# Altium PCB PCB_daQ.PcbDoc
Units mil, origin at the board's own origin, x right, y up, seen from the top; angles counter-clockwise.
Board outline 3750 x 3200 mil, 2 copper layers (Top Layer, Bottom Layer); 25 components, 41 nets, 141 pads, 35 vias.
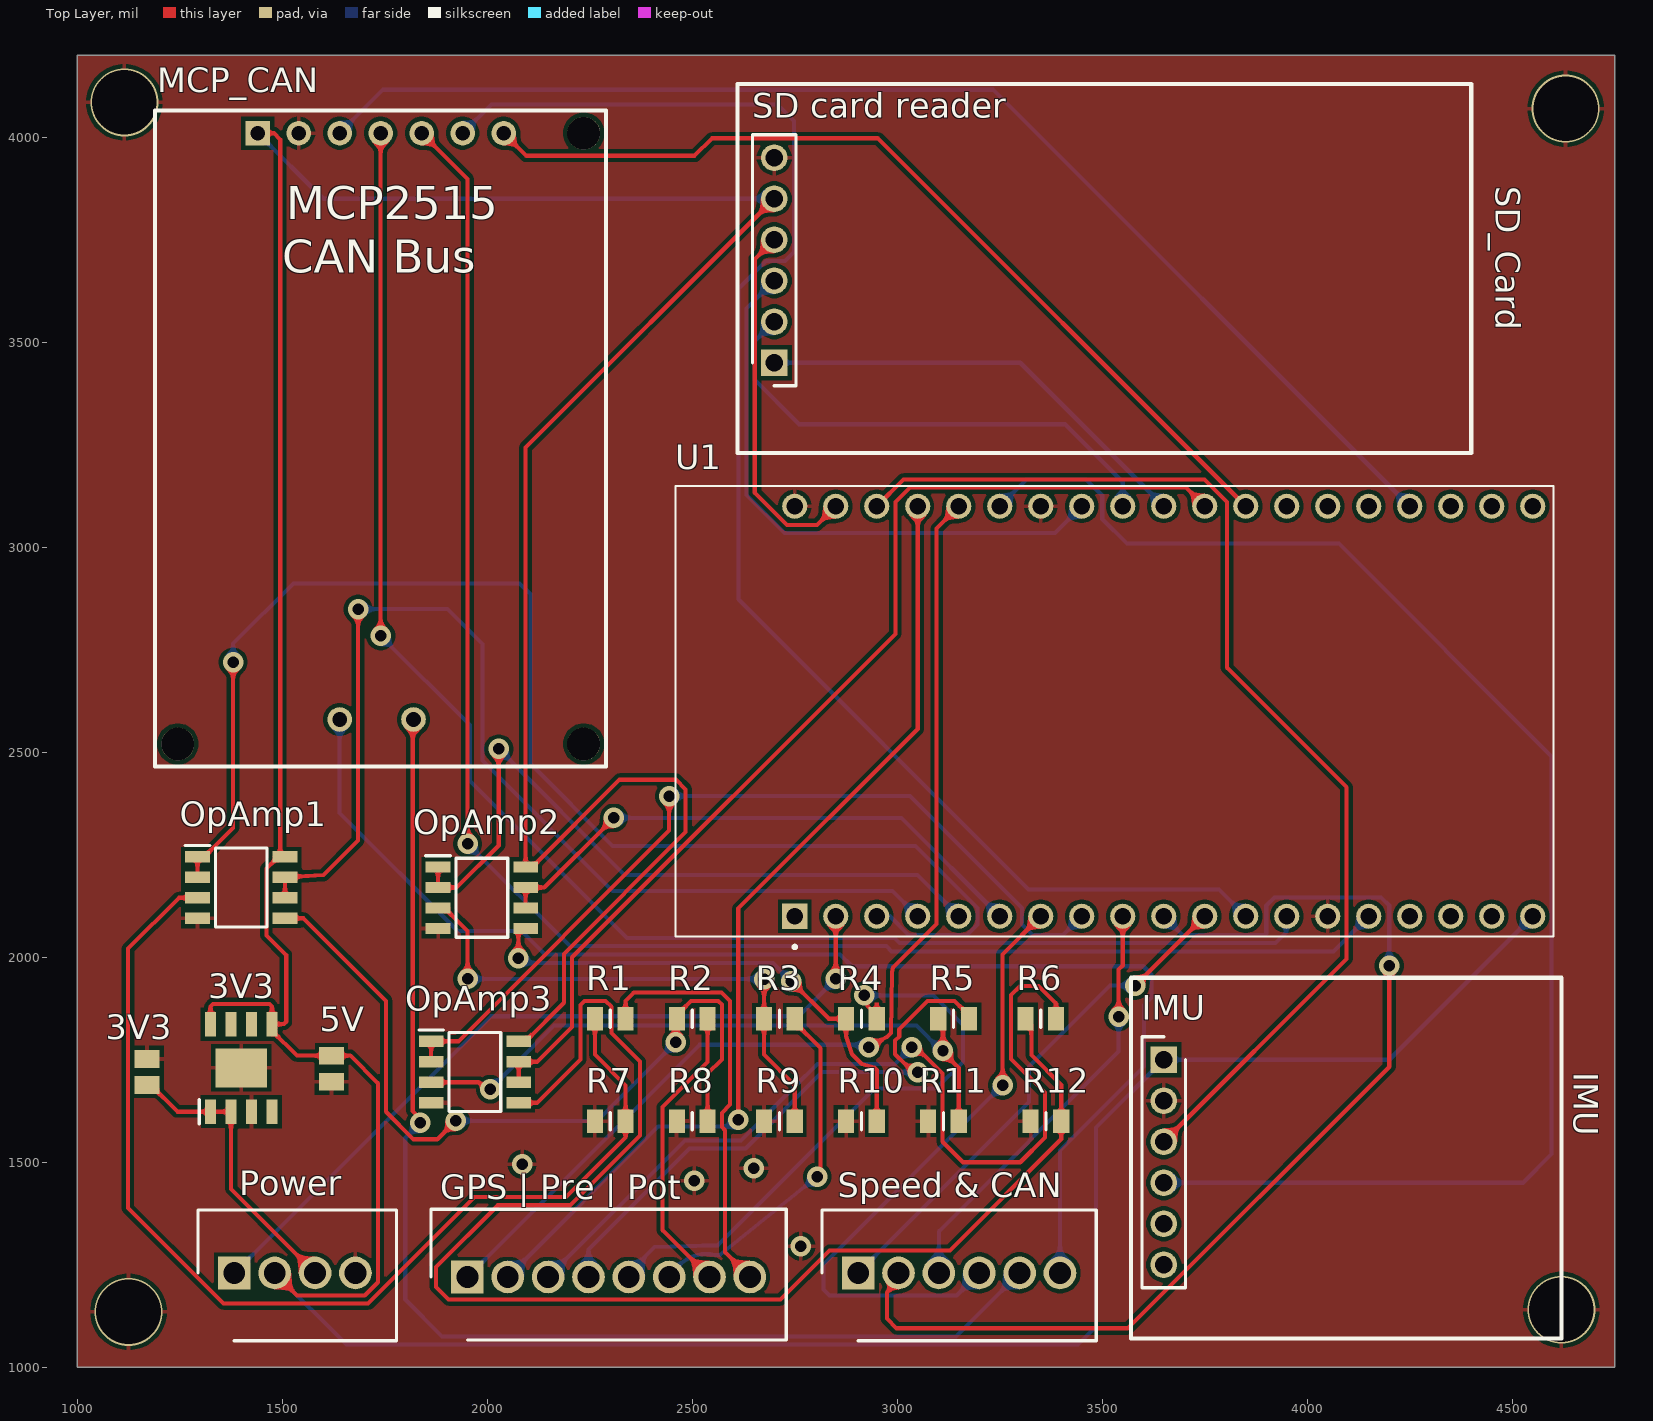
[diagram p0: Top Layer view]
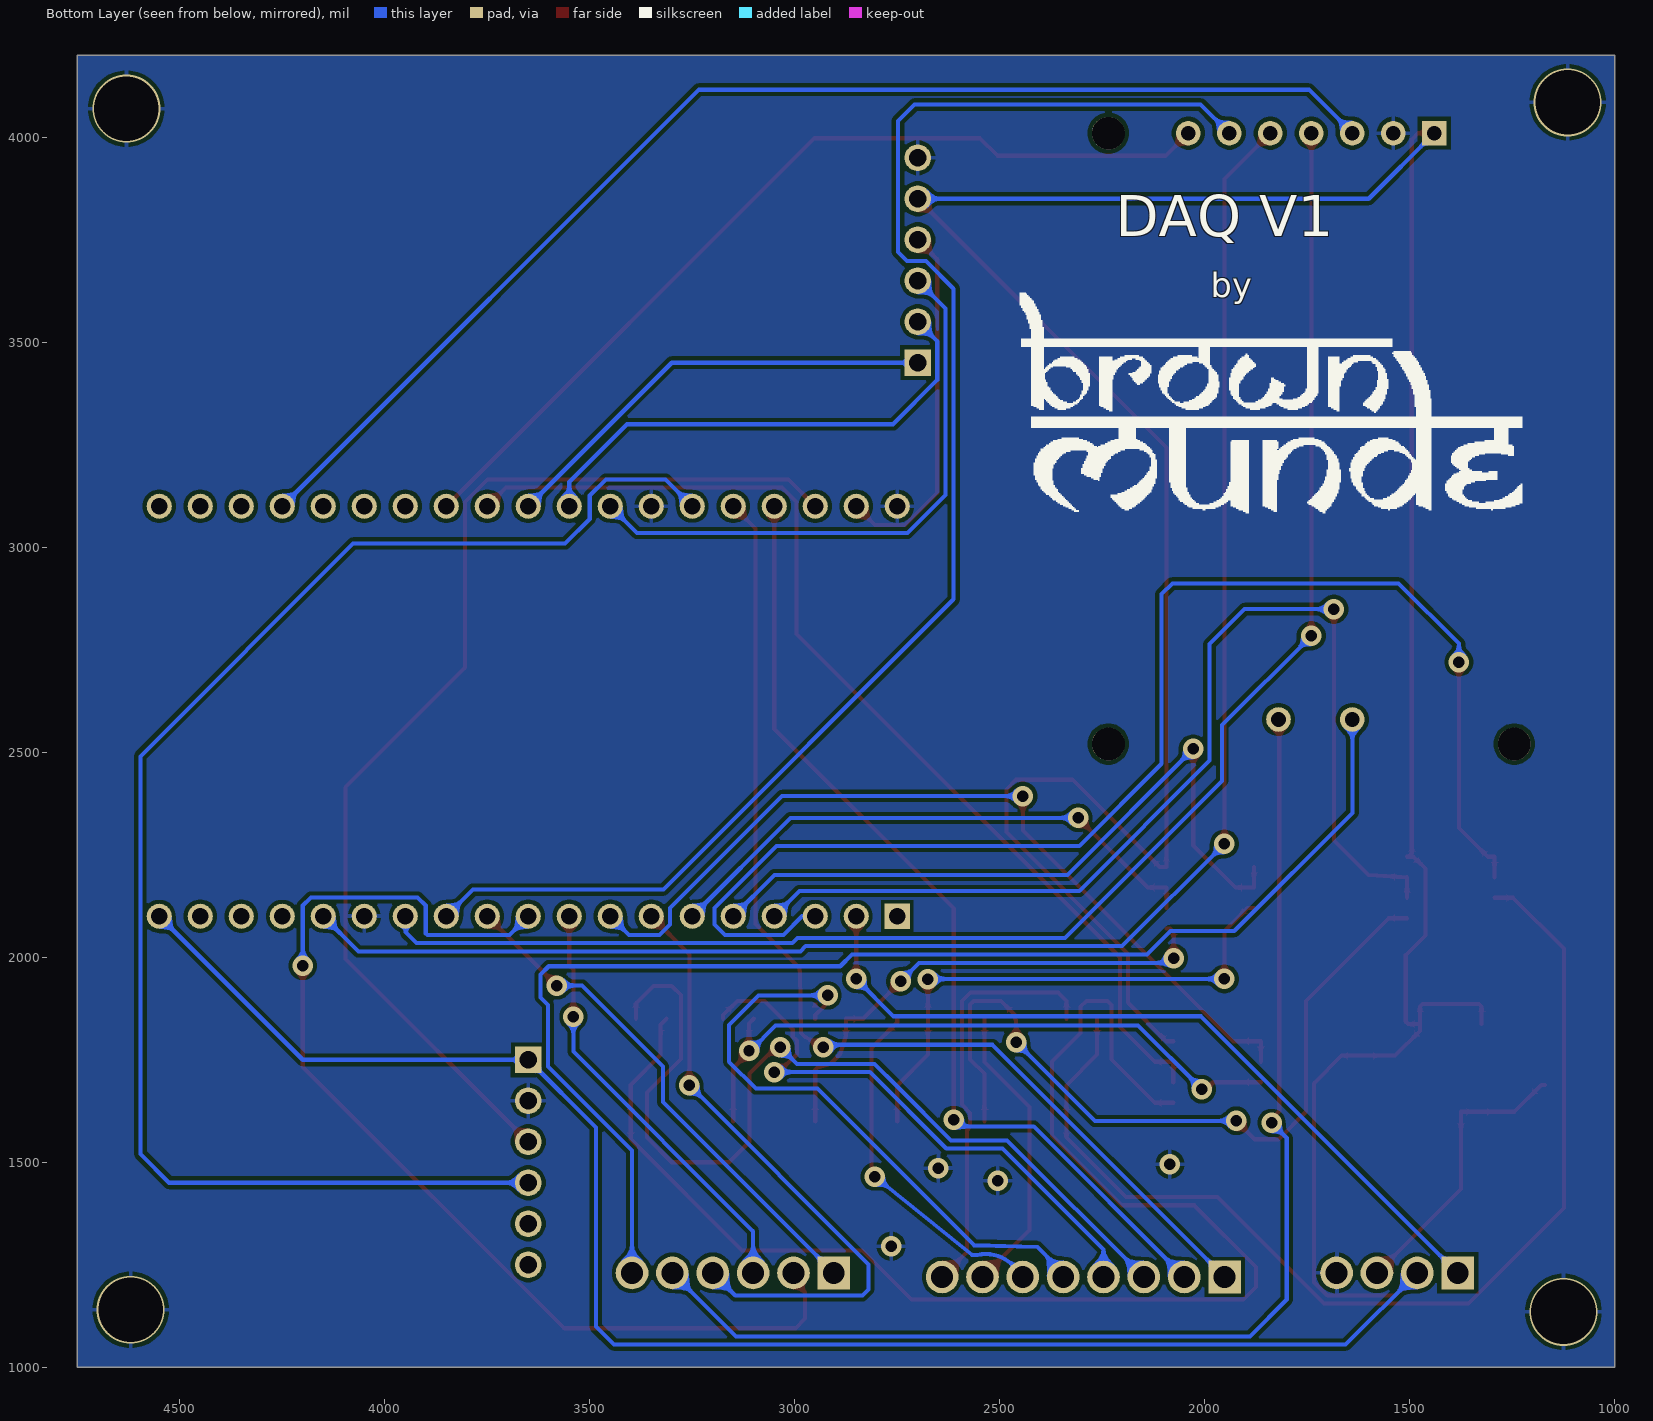
[diagram p1: Bottom Layer view, seen from below]
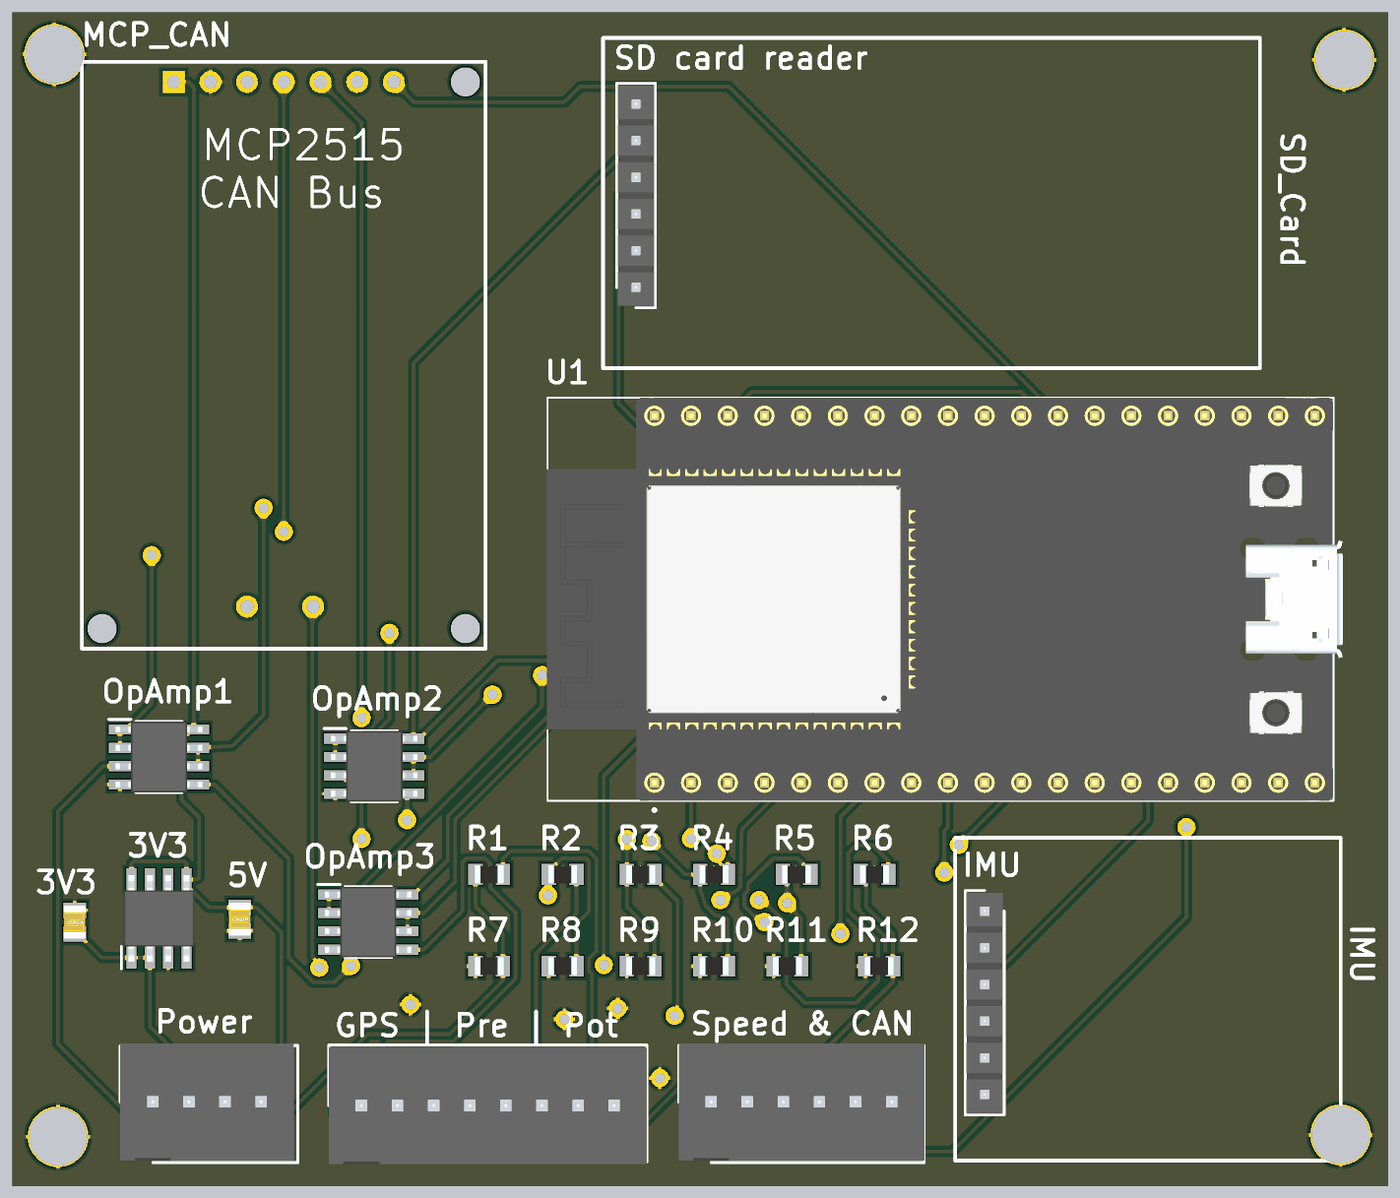
[diagram p2: 3D render of the assembled board from above, using the file's embedded part models]

## Layer stack, top to bottom
Top Solder: solder mask 0.4, Solder Resist, Dk 3.5
Top Layer: signal copper 1.4
Dielectric 1: dielectric 12.6, FR-4, Dk 4.8
Bottom Layer: signal copper 1.4
Bottom Solder: solder mask 0.4, Solder Resist, Dk 3.5

## Board outline
1000,1000 4750,1000 4750,4200 1000,4200

## Design rules (kind name [scope] priority, off if disabled: settings)
Clearance [All] p1: gap=10 ignorepadtopadclearanceinfootprint=FALSE except(0: Arc-Hole Track-Hole SMDPad-Hole THPad-Hole Via-Hole Fill-Hole Poly-Hole Region-Hole Text-Hole)
PolygonConnect [All] p1: connectstyle=Relief reliefconductorwidth=10 reliefentries=4 polygonreliefangle="90 Angle" airgapwidth=10
RoutingVias [All] p1: holewidth=28 width=50 viastyle="Through Hole" minholewidth=28 minwidth=50 maxholewidth=28 maxwidth=50
SolderMaskExpansion [All] p1: expansion=4 istentingtop=FALSE
Width [All] p1: maxlimit=10 minlimit=10 preferedwidth=10
30 further rules are at their usual default settings.

## Classes and differential pairs
component class Sheet_daq: 3V3 5V "GPS " imu MCP_CAN OpAmp1 OpAmp2 Power R1 R2 R3 R4 R5 R6 R7 R8 R9 R10 R11 R12 "SD card reader" U1

## Components (designator, comment, footprint, x,y, rotation, side; value= is the part's Value field where it differs from the comment)
3V3 "BD33HC5WEFJ-E2" SOIC127P600X100-9N 1400,1730 r90 top (schematic designator IC1)
3V3 "C0805X102KMRECAUTO7210" CAPC2012X98N 1170,1720 r90 top (schematic designator C1)
5V "C0805X102KMRECAUTO7210" CAPC2012X98N 1620,1728.11 r90 top (schematic designator C2)
"GPS | Pre | Pot" "691382000008" SHDR8W80P0X250_1X8_2200X810X1010P 1951.57,1220 r0 top (schematic designator J2)
IMU "61300611121" HDRV6W64P0X254_1X6_1524X254X869P 3650,1750 r270 top (schematic designator imu)
MCP_CAN "MCP2515" MCP_2515 1745,3185 r270 top (schematic designator *)
OpAmp1 "LM358ADR2G" SOIC127P600X175-8N 1400,2170 r0 top (schematic designator IC3)
OpAmp2 "LM358ADR2G" SOIC127P600X175-8N 1986.77,2145 r0 top (schematic designator IC2)
OpAmp3 "LM358ADR2G" SOIC127P600X175-8N 1970,1720 r0 top (schematic designator IC4)
Power "691382000004" SHDR4W80P0X250_1X4_1200X810X1010P 1383.15,1230 r0 top (schematic designator J1)
R1 "AECR0805F27R0K9" RESC2012X65N 2300,1850 r0 top
R2 "AECR0805F27R0K9" RESC2012X65N 2500,1850 r0 top
R3 "AECR0805F27R0K9" RESC2012X65N 2712.6,1850 r0 top
R4 "AECR0805F27R0K9" RESC2012X65N 2912.6,1850 r0 top
R5 "AECR0805F27R0K9" RESC2012X65N 3137.4,1850 r0 top
R6 "AECR0805F27R0K9" RESC2012X65N 3350,1850 r0 top
R7 "AECR0805F27R0K9" RESC2012X65N 2300,1600 r0 top
R8 "AECR0805F27R0K9" RESC2012X65N 2500,1600 r0 top
R9 "AECR0805F27R0K9" RESC2012X65N 2712.6,1600 r0 top
R10 "AECR0805F27R0K9" RESC2012X65N 2912.6,1600 r0 top
R11 "AECR0805F27R0K9" RESC2012X65N 3112.6,1600 r0 top
R12 "AECR0805F27R0K9" RESC2012X65N 3362.6,1600 r0 top
"SD card reader" "61300611121" HDRV6W64P0X254_1X6_1524X254X869P 2700,3450 r90 top
"Speed & CAN" "691382000006" SHDR6W80P0X250_1X6_1700X810X1010P 2904.72,1230 r0 top (schematic designator J3)
U1 "ESP32-DEVKITC-32D" MODULE_ESP32-DEVKITC-32D 3527.95,2600 r90 top

## Footprints (in the part's own frame and the unit in brackets; to place one, negate y for a bottom-side part, rotate by r counter-clockwise, add the part's x,y. Pads: shape width x height; smd on the part's side, far side on the other; paste and mask are expansions set on the pad)
CAPC2012X98N [mm]
  rect 1.1x1.57 smd: 1(-0.81,0) 2(0.81,0)
  body extent -1.15,-0.78 1.15,0.77, height 0.98
HDRV6W64P0X254_1X6_1524X254X869P [mm]
  rect 1.65x1.65 hole 1.1: 1(0,0)
  round 1.65 hole 1.1: 2(2.54,0) 3(5.08,0) 4(7.62,0) 5(10.16,0) 6(12.7,0)
  silkscreen extent -1.42,-1.34 14.12,1.34, body extent -1.27,-1.27 13.97,1.27, height 8.69
MCP_2515 [mil]
  rect 60x60 hole 36 paste+0 mask+2: 1(-825,-305)
  round 60 hole 36 paste+0 mask+2: 2(-825,-205) 3(-825,-105) 4(-825,-5) 5(-825,95) 6(-825,195) 7(-825,295) 8(605,75) 9(605,-105)
  round 80 hole 80 unplated paste+0: ""(-825,490) ""(665,490) ""(665,-500)
  silkscreen extent -880,-555 720,545
MODULE_ESP32-DEVKITC-32D [mm]
  rect 1.56x1.56 / inner round 1.56 / far side rect 1.56x1.56 hole 1.04: J2-1(-12.7,19.76)
  round 1.56 hole 1.04: J2-2(-12.7,17.22) J2-3(-12.7,14.68) J2-4(-12.7,12.14) J2-5(-12.7,9.6) J2-6(-12.7,7.06) J2-7(-12.7,4.52) J2-8(-12.7,1.98) J2-9(-12.7,-0.56) J2-10(-12.7,-3.1) J2-11(-12.7,-5.64) J2-12(-12.7,-8.18) J2-13(-12.7,-10.72) J2-14(-12.7,-13.26) J2-15(-12.7,-15.8) J2-16(-12.7,-18.34) J2-17(-12.7,-20.88) J2-18(-12.7,-23.42) J2-19(-12.7,-25.96) J3-1(12.7,19.76) J3-2(12.7,17.22) J3-3(12.7,14.68) J3-4(12.7,12.14) J3-5(12.7,9.6) J3-6(12.7,7.06) J3-7(12.7,4.52) J3-8(12.7,1.98) J3-9(12.7,-0.56) J3-10(12.7,-3.1) J3-11(12.7,-5.64) J3-12(12.7,-8.18) J3-13(12.7,-10.72) J3-14(12.7,-13.26) J3-15(12.7,-15.8) J3-16(12.7,-18.34) J3-17(12.7,-20.88) J3-18(12.7,-23.42) J3-19(12.7,-25.96)
  silkscreen extent -14.7,-27.25 13.95,27.15, body extent -13.97,-27.9 13.97,27.2, height 6.69
RESC2012X65N [mm]
  rect 1x1.45 smd: 1(-0.95,0) 2(0.95,0)
  silkscreen extent 0,-0.53 0,0.53, body extent -1,-0.63 1,0.63, height 0.65
SHDR4W80P0X250_1X4_1200X810X1010P [mm]
  rect 2.025x2.025 hole 1.35: 1(0,0)
  round 2.025 hole 1.35: 2(2.5,0) 3(5,0) 4(7.5,0)
  silkscreen extent -2.25,-4.2 10.05,3.9, body extent -2.25,-4.05 9.75,4.05, height 10.1
SHDR6W80P0X250_1X6_1700X810X1010P [mm]
  rect 2.025x2.025 hole 1.35: 1(0,0)
  round 2.025 hole 1.35: 2(2.5,0) 3(5,0) 4(7.5,0) 5(10,0) 6(12.5,0)
  silkscreen extent -2.25,-4.2 14.75,3.9, body extent -2.25,-4.05 14.75,4.05, height 10.1
SHDR8W80P0X250_1X8_2200X810X1010P [mm]
  rect 2.025x2.025 hole 1.35: 1(0,0)
  round 2.025 hole 1.35: 2(2.5,0) 3(5,0) 4(7.5,0) 5(10,0) 6(12.5,0) 7(15,0) 8(17.5,0)
  silkscreen extent -2.25,-3.9 19.75,4.2, body extent -2.25,-4.05 19.75,4.05, height 10.1
SOIC127P600X100-9N [mm]
  rect 1.525x0.7 smd: 1(-2.712,1.905) 2(-2.712,0.635) 3(-2.712,-0.635) 4(-2.712,-1.905) 5(2.712,-1.905) 6(2.712,-0.635) 7(2.712,0.635) 8(2.712,1.905)
  rect 2.4x3.2 smd: 9(0,0)
  silkscreen extent -3.47,2.61 -1.95,2.61, body extent -3,-2.45 3,2.45, height 1
SOIC127P600X175-8N [mm]
  rect 1.525x0.7 smd: 1(-2.712,1.905) 2(-2.712,0.635) 3(-2.712,-0.635) 4(-2.712,-1.905) 5(2.712,-1.905) 6(2.712,-0.635) 7(2.712,0.635) 8(2.712,1.905)
  silkscreen extent -3.47,-2.45 1.6,2.61, body extent -3,-2.45 3,2.45, height 1.75

## Part data
3V3: "Integrated Circuit", Manufacturer_Name="ROHM Semiconductor", Mouser Part Number=755-BD33HC5WEFJ-E2, Datasheet Link=http://rohmfs.rohm.com/en/products/databook/datasheet/ic/power/linear_regulator/bdxxhc5wefj-e.pdf, Height=1mm, Manufacturer_Part_Number=BD33HC5WEFJ-E2, Mouser Price/Stock=https://www.mouser.co.uk/ProductDetail/ROHM-Semiconductor/BD33HC5WEFJ-E2?qs=QbAZ1slfEbRItL%252B7JDc95w%3D%3D
3V3 5V: "Capacitor", Manufacturer_Name=KEMET, Mouser Part Number=80-C0805X102KMREAULR, Datasheet Link=https://connect.kemet.com:7667/gateway/IntelliData-ComponentDocumentation/1.0/download/specsheet/C0805X102KMRECAUTO7210, Height=0.98mm, Manufacturer_Part_Number=C0805X102KMRECAUTO7210, Mouser Price/Stock=https://www.mouser.co.uk/ProductDetail/KEMET/C0805X102KMRECAUTO7210?qs=MLItCLRbWszzMnEf80750Q%3D%3D
"GPS | Pre | Pot": "Connector", Manufacturer_Name="Wurth Elektronik", Mouser Part Number=710-691382000008, Datasheet Link=http://katalog.we-online.de/em/datasheet/6913820000xx.pdf, Height=10.1mm, Manufacturer_Part_Number=691382000008, Mouser Price/Stock=https://www.mouser.co.uk/ProductDetail/Wurth-Elektronik/691382000008?qs=a9WhcLg8qCyuKMyFRlGfoA%3D%3D
IMU "SD card reader": "Connector", Manufacturer_Name="Wurth Elektronik", Mouser Part Number=710-61300611121, Datasheet Link=https://componentsearchengine.com/Datasheets/2/61300611121.pdf, Height=8.69mm, Manufacturer_Part_Number=61300611121, Mouser Price/Stock=https://www.mouser.co.uk/ProductDetail/Wurth-Elektronik/61300611121?qs=t4813l51qx%2FRpdf0Kp1HlQ%3D%3D
OpAmp1 OpAmp2 OpAmp3: "Integrated Circuit", Manufacturer_Name=onsemi, Mouser Part Number=863-LM358ADR2G, Arrow Part Number=LM358ADR2G, Arrow Price/Stock=https://www.arrow.com/en/products/lm358adr2g/on-semiconductor?region=nac, Datasheet Link=https://datasheet.datasheetarchive.com/originals/distributors/Datasheets-23/DSA-455095.pdf, Height=1.75mm, Manufacturer_Part_Number=LM358ADR2G, Mouser Price/Stock=https://www.mouser.co.uk/ProductDetail/onsemi/LM358ADR2G?qs=HEOlnOCGiuJfsoeLY%252BqMsw%3D%3D
Power: "Connector", Manufacturer_Name="Wurth Elektronik", Mouser Part Number=710-691382000004, Datasheet Link=http://katalog.we-online.de/em/datasheet/6913820000xx.pdf, Height=10.1mm, Manufacturer_Part_Number=691382000004, Mouser Price/Stock=https://www.mouser.co.uk/ProductDetail/Wurth-Elektronik/691382000004?qs=a9WhcLg8qCyFbLIGoZKy%252Bg%3D%3D
R1 R2 R3 R4 R5 R6 R7 R8 R9 R10 R11 R12: "Resistor", Manufacturer_Name=ResistorToday, Datasheet Link=https://datasheet.lcsc.com/lcsc/2304140030_RESI-AECR0805F27R0K9_C352233.pdf, Height=0.65mm, Manufacturer_Part_Number=AECR0805F27R0K9
"Speed & CAN": "Connector", Manufacturer_Name="Wurth Elektronik", Mouser Part Number=710-691382000006, Datasheet Link=http://katalog.we-online.de/em/datasheet/6913820000xx.pdf, Height=10.1mm, Manufacturer_Part_Number=691382000006, Mouser Price/Stock=https://www.mouser.co.uk/ProductDetail/Wurth-Elektronik/691382000006?qs=a9WhcLg8qCwuNwM0bBybCQ%3D%3D
U1: library part CMP-003-000000-1, "WiFi Development Tools (802.11) ESP32 General Development Kit, ESP32-WROOM-32D on the board", Package=None, Check_prices=https://www.snapeda.com/parts/ESP32-DEVKITC-32D/Espressif+Systems/view-part/?ref=eda, Component Type=Standard, Design Item ID=ESP32-DEVKITC-32D, MF="Espressif Systems", MP=ESP32-DEVKITC-32D, Pin Count=38, SnapEDA_Link=https://www.snapeda.com/parts/ESP32-DEVKITC-32D/Espressif+Systems/view-part/?ref=snap, Source=ESP32-DEVKITC-32D.SchLib

## Via types
v1: diameter 50, hole 28, Top Layer to Bottom Layer, 31 vias
v2: diameter 165.35, hole 157.48, Top Layer to Bottom Layer, 4 vias

## Nets (pads, with @x,y where several pads share a name; then routed paths per layer and width w, separated by ;. In a path a pad name is that pad's centre, name@x,y a point inside that pad or via, vN(x,y) a via of type N, cw(c..) or ccw(c..) an arc to the next point about the centre after c; other vN are vias at no path point)
3.3V: 3V3.1 3V3.2@1375,1623.23 Power.3 | length 710
  Top Layer w10: 3V3.1@1170,1688.11 1179.25,1688.11 1244.13,1623.23 1325,1623.23 1375,1623.23 1375,1435 Power.3
5V: 3V3.5 3V3.8 5V.2 "SD card reader.5" IMU.1 MCP_CAN.1 OpAmp1.8 OpAmp2.8 OpAmp3.8 Power.2 U1.J2-19 | length 11993.1
  Top Layer w10: 3V3.8 1325,1880 1330.86,1885.86 1469.14,1885.86 1475,1880 3V3.5 ; MCP_CAN.1 1480,4010 1495,3995 1495,2253.78 1503.78,2245 OpAmp1.8 ; Power.2 1536.44,1175.14 1701.15,1175.14 1733.29,1207.28 1733.29,1692.62 1665.91,1760 1535.53,1760 1475,1820.53 3V3.5 ; OpAmp1.8@1506,2245 1490.53,2245 1461.75,2216.22 1461.75,2053.37 1509.64,2005.48 1509.64,1842.63 1503.78,1836.77 3V3.5 ; OpAmp3.8 2093.01,1795 2187,1888.99 2187,2008.28 2483.75,2305.03 2483.75,2409.57 2460.31,2433 2322.78,2433 2109.78,2220 OpAmp2.8 2093.54,3243.54 2700,3850
  Bottom Layer w10: MCP_CAN.1 1600,3850 2700,3850 ; Power.2 1656.57,1055 3441,1055 3485,1099 3485,1585 IMU.1 4200,1750 U1.J2-19
A2+: OpAmp1.3 R1.1 R7.2 | length 2651.8
  Top Layer w10: OpAmp1.3 1248.21,2145 1124.09,2020.89 1124.09,1388.12 1357.07,1155.14 1709.43,1155.14 1969.3,1415 2192.4,1415 2337.4,1560 2337.4,1687.6 2262.6,1762.4 R1.1
A22+: OpAmp2.3 R3.1 R9.2 | length 1312.9
  Top Layer w10: OpAmp2.3 1896.24,2120 1952,2064.24 v1(1952,1947) ; v1(2675.2,1946) 2675.2,1762.4 2750,1687.6 R9.2
  Bottom Layer w10: v1(1952,1947) 2674.2,1947 v1(2675.2,1946)
A232+: OpAmp3.3 R5.1 R11.2 | length 1615.2
  Top Layer w10: OpAmp3.3 1979.18,1695 1996.18,1678 v1(2007,1678) ; R5.1 3111.57,1838.43 v1(3111.57,1771.57) ; v1@3110,1770 3150,1730 R11.2
  Bottom Layer w10: v1(2007,1678) 2162.46,1833.46 3046.54,1833.46 3108.43,1771.57 v1(3111.57,1771.57)
A242+: OpAmp3.5 R6.1 R12.2 | length 3464.1
  Top Layer w10: OpAmp3.5 2121.79,1645 2227,1750.21 2227,1883.84 2236.7,1893.54 2288.5,1893.54 2302.72,1879.32 2302.72,1815.24 2372.09,1745.87 2372.09,1565.24 2201.84,1395 2025.64,1395 1875,1244.36 1875,1195.64 1905.5,1165.14 2715.14,1165.14 2834.86,1284.86 3128.41,1284.86 3400,1556.46 3400,1688.64 3327.28,1761.36 3327.28,1835.31 R6.1
B1+: OpAmp1.5 R2.1 R8.2 | length 1926.6
  Top Layer w10: OpAmp1.5 1551.79,2095 1753.29,1893.5 1753.29,1623.14 1820.43,1556 1878,1556 v1(1923,1601) ; v1(2460,1793) 2460,1847.4 R2.1 2462.6,1858.86 2497.28,1893.54 2563.3,1893.54 2572.09,1884.76 2572.09,1750.65 2537.4,1715.96 R8.2
  Bottom Layer w10: v1(1923,1601) 2268,1601 v1(2460,1793)
B11+: OpAmp2.5 R4.1 R10.2 | length 1232.3
  Top Layer w10: v1(2076,1998) 2076,2061.22 2084.78,2070 OpAmp2.5 ; v1(2742,1941) 2833,1850 R4.1 2875.2,1807.8 2890,1763.43 2913.43,1740 2944.14,1730.86 2950,1725 R10.2
  Bottom Layer w10: v1(2076,1998) 2088,1986 2697,1986 v1(2742,1941)
Buffer_pot: OpAmp3.6 OpAmp3.7 U1.J3-11 | length 2610.2
  Top Layer w10: OpAmp3.6 OpAmp3.7 2121.79,1745 2207,1830.21 2207,2000 2995.71,2788.71 2995.71,3110.35 3031.07,3145.71 3704.29,3145.71 U1.J3-11
CAN_CLK: MCP_CAN.6 U1.J2-12 | length 3661.2
  Bottom Layer w10: MCP_CAN.6 2010,4080 2708,4080 2748,4040 2748,3720 2726,3698 2680,3698 2612.52,3630.52 2612.52,2873.19 3320,2165.71 3784.29,2165.71 U1.J2-12
CAN_CS: MCP_CAN.3 U1.J3-16 | length 3074.7
  Bottom Layer w10: MCP_CAN.3 1746,4116 3234,4116 U1.J3-16
CAN_H: "Speed & CAN.5" MCP_CAN.8 | length 3038.8
  Top Layer w10: MCP_CAN.8 1818.21,2578.21 1818.21,1625.01 1837,1606.22 v1(1837,1596)
  Bottom Layer w10: v1(1837,1596) 1800,1559 1800,1165 1890,1075 3143.43,1075 3298.43,1230
CAN_INT: MCP_CAN.7 U1.J3-12 | length 2222.1
  Top Layer w10: MCP_CAN.7 2095,3955 2505.75,3955 2548.23,3997.48 2952.52,3997.48 U1.J3-12
CAN_L: "Speed & CAN.6" MCP_CAN.9 | length 3191.6
  Bottom Layer w10: MCP_CAN.9 1640,2352 1928,2064 2084,2064 2141,2007 2860,2007 2889,1978 3600,1978 3620,1958 3620,1902 3602,1884 3602,1734 3396.85,1528.85 3396.85,1230
CAN_MISO: MCP_CAN.4 U1.J2-13 | length 3875.9
  Top Layer w10: v1(1740,2784) MCP_CAN.4
  Bottom Layer w10: v1(1740,2784) 1957.89,2566.11 1957.89,2430.11 2341,2047 2993.29,2047 3006,2034.29 3922.62,2034.29 3948.48,2060.15 3948.48,2098.48 U1.J2-13
CAN_MOSI: MCP_CAN.5 U1.J2-15 | length 4122.1
  Top Layer w10: MCP_CAN.5 1952,3898 v1(1952,2276.41)
  Bottom Layer w10: v1(1952,2276.41) 2201.41,2027 2973.29,2027 2986,2014.29 4064.29,2014.29 U1.J2-15
Enable: Power.1 U1.J2-2 | length 1916.8
  Top Layer w10: v1(2850,1947) U1.J2-2
  Bottom Layer w10: Power.1 2009.15,1856 2759,1856 v1(2850,1947)
GND: 3V3.2@1170,1751.89 3V3.3 3V3.9 5V.1 "SD card reader.6" IMU.2 MCP_CAN.2 OpAmp1.4 OpAmp2.4 OpAmp3.4 Power.4 R7.1 R8.1 R9.1 R10.1 R11.1 R12.1 U1.J2-14 U1.J3-1 U1.J3-7
  other v1: 2765,1295 2505,1455 2650,1485 2085,1495
  other v2: 1125,1135 4620,1140 4630,4070 1115,4085
GPS_rx: "GPS | Pre | Pot.2" U1.J3-4 | length 2402.7
  Top Layer w10: v1(2612.09,1603.18) 2612.09,2118.54 3050,2556.46 U1.J3-4
  Bottom Layer w10: 2050,1220 2416.98,1586.98 2602.15,1586.98 2612.09,1596.92 v1(2612.09,1603.18)
GPS_tx: "GPS | Pre | Pot.1" U1.J3-5 | length 2632.5
  Top Layer w10: v1(2930,1780) 2974.97,1805.92 2975.9,1806.46 2984.69,1815.24 2987.35,1963.45 2990.14,1975.5 3095.71,2081.07 3095.71,3045.71 U1.J3-5
  Bottom Layer w10: 1951.57,1220 2518.03,1786.46 2923.54,1786.46 v1(2930,1780)
IMU_SCL: IMU.3 U1.J3-3 | length 2770.1
  Top Layer w10: U1.J3-3 3015.71,3165.71 3748.93,3165.71 3804.29,3110.35 3804.29,2706.17 4095.71,2414.76 4095.71,1995.71 IMU.3
IMU_SDA: IMU.4 U1.J3-6 | length 3631.5
  Bottom Layer w10: U1.J3-6 3315.71,3165.71 3460.29,3165.71 3500,3126 3500,3069 3560,3009 4077,3009 4596,2490 4596,1520 4526,1450 IMU.4
Pot_buffer: "GPS | Pre | Pot.3" R6.2 | length 2237.9
  Top Layer w10: v1(3035,1780) 3045.82,1780 3065.82,1760 3066.57,1760 3110,1716.57 3110,1550 3160,1500 3300,1500 3360,1560 3360,1670 3277.91,1752.09 3277.91,1907.91 3300,1930 3345,1930 3387.31,1887.69 3387.31,1850.09 R6.2
  Bottom Layer w10: 2148.43,1220 2481.93,1553.5 2618.97,1553.5 2750,1684.53 2750,1685 2805,1740 2995,1740 v1(3035,1780)
Pot_FL: OpAmp2.6 OpAmp2.7 U1.J2-6 | length 1376.3
  Top Layer w10: OpAmp2.6 OpAmp2.7 2139,2170 v1(2309,2340)
  Bottom Layer w10: v1(2309,2340) 3010,2340 U1.J2-6
Pot_FL_in: "GPS | Pre | Pot.5" R4.2 | length 1470.4
  Top Layer w10: v1(2920,1907) 2927.65,1899.35 2927.65,1881.2 2950,1858.86 R4.2
  Bottom Layer w10: 2345.28,1220 2359.5,1220 2362.43,1222.93 2364.66,1225.17 cw(c2453.79,1211.21) 2390,1275 2407.84,1292.85 2562.66,1297.66 2945,1680 3095,1680 3160,1745 3160,1835 3088,1907 v1(2920,1907)
Pot_FR: OpAmp2.1 OpAmp2.2 U1.J2-5 | length 1766.7
  Top Layer w10: OpAmp2.1 OpAmp2.2 1925.02,2170 2028,2272.98 v1(2028,2508)
  Bottom Layer w10: v1(2028,2508) 2335,2201 3049,2201 U1.J2-5
Pot_FR_in: "GPS | Pre | Pot.6" R3.2 | length 866.5
  Top Layer w10: R3.2 2750,1841.14 2813,1778.14 2813,1490.86 2812.65,1490.51 2812.65,1472.65 v1(2805,1465)
  Bottom Layer w10: 2443.7,1220 2446.49,1233.88 2451.55,1238.94 2473.84,1254.21 2485.7,1262.69 cw(c2533.92,1182.72) 2554,1273.91 2567.2,1273.91 v1(2805,1465)
Pot_RL: OpAmp1.6 OpAmp1.7 U1.J2-4 | length 2669.1
  Top Layer w10: OpAmp1.6 OpAmp1.7 1531.79,2196.4 1600.24,2200.24 1685,2285 1685,2579.7 ccw(c1640,2580) 1685,2580.3 v1(1685,2849)
  Bottom Layer w10: v1(1685,2849) 1903,2849 1988,2764 1988,2480 2306,2162 2988,2162 U1.J2-4
Pot_RL_in: "GPS | Pre | Pot.7" R2.2 | length 722.7
  Top Layer w10: R2.2 2537.4,1744.25 2427.91,1634.76 2427.91,1334.21 2542.13,1220
Pot_RR: OpAmp1.1 OpAmp1.2 U1.J2-3 | length 3378.5
  Top Layer w10: OpAmp1.2 OpAmp1.1 1309.47,2245 1380,2315.53 v1(1380,2720)
  Bottom Layer w10: v1(1380,2720) 1380,2765 1527,2912 2079,2912 2105,2886 2105,2472 2306,2271 3045,2271 3196,2120 3196,2080 3170.29,2054.29 3027.71,2054.29 2982,2100 U1.J2-3
Pot_RR_in: "GPS | Pre | Pot.8" R1.2 | length 1024.7
  Top Layer w10: R1.2 2337.4,1893.54 2357.4,1913.54 2571.58,1913.54 2592.09,1893.04 2592.09,1640.42 2572.09,1620.42 2572.09,1585.94 2580,1578.03 2580,1280.55 2640.55,1220
Press: "GPS | Pre | Pot.4" R5.2 | length 1409.2
  Top Layer w10: v1(3050,1720) 3039.18,1720 3019.18,1740 3018.43,1740 2995,1763.43 2995,1796.57 3005,1806.57 3005,1824.44 3074.1,1893.54 3140.12,1893.54 3174.8,1858.86 R5.2
  Bottom Layer w10: 2246.85,1220 2246.85,1286.85 2493.5,1533.5 2630.49,1533.5 2816.99,1720 v1(3050,1720)
Pressure: OpAmp3.1 OpAmp3.2 U1.J2-8 | length 2116.2
  Top Layer w10: OpAmp3.2 OpAmp3.1 1929.57,1795 2443.75,2309.18 v1(2443.75,2393)
  Bottom Layer w10: v1(2443.75,2393) 3031,2393 3304,2120 3304,2080 3329.71,2054.29 3404.29,2054.29 U1.J2-8
SDCard_CLK: "SD card reader.2" U1.J3-9 | length 1221.6
  Bottom Layer w10: 2700,3550 2652.52,3502.52 2652.52,3407.48 2760,3300 3409,3300 3550,3159 U1.J3-9
SDCard_CS: "SD card reader.1" U1.J3-10 | length 1095
  Bottom Layer w10: 2700,3450 3300,3450 U1.J3-10
SDCard_MISO: "SD card reader.4" U1.J3-2 | length 885.8
  Top Layer w10: 2700,3750 2652.52,3702.52 2652.52,3132.84 2731.07,3054.29 2804.29,3054.29 U1.J3-2
SDCard_MOSI: "SD card reader.3" U1.J3-8 | length 1433.2
  Bottom Layer w10: 2700,3650 2632.52,3582.52 2632.52,3127.48 2725,3035 3385,3035 U1.J3-8
Speed_FL: "Speed & CAN.1" U1.J2-11 | length 1256.6
  Top Layer w10: v1(3580,1931) 3580.5,1931 3749.5,2100 U1.J2-11
  Bottom Layer w10: 2904.72,1230 3321.39,1646.67 3321.39,1733.75 3518.65,1931 v1(3580,1931)
Speed_FR: "Speed & CAN.2" U1.J2-10 | length 2670.2
  Top Layer w10: 3003.15,1230 3003.15,1211.13 2975,1182.98 2975,1118.43 2998.43,1095 3562.15,1095 4200,1732.85 v1(4200,1979)
  Bottom Layer w10: U1.J2-10 3695.71,2054.29 3896,2054.29 3900,2058.29 3900,2126 3920,2146 4180,2146 4200,2126 v1(4200,1979)
Speed_RL: "Speed & CAN.3" U1.J2-9 | length 1055.7
  Top Layer w10: v1(3540,1855) 3540,1969.86 3550,1979.86 U1.J2-9
  Bottom Layer w10: 3101.57,1230 3101.57,1331.57 3540,1770 v1(3540,1855)
Speed_RR: "Speed & CAN.4" U1.J2-7 | length 1538.4
  Top Layer w10: v1(3257,1688) 3257,2007 U1.J2-7
  Bottom Layer w10: 3200,1230 3145.14,1175.14 2834.86,1175.14 2820,1190 2820,1251 v1(3257,1688)
pads on no net: 3V3.4 3V3.6 3V3.7 IMU.5 IMU.6 MCP_CAN. U1.J2-1 U1.J2-16 U1.J2-17 U1.J2-18 U1.J3-13 U1.J3-14 U1.J3-15 U1.J3-17 U1.J3-18 U1.J3-19

## Polygon pours and split planes (outlines as drawn)
GND on Bottom Layer "GND_L02_P001" (solid, pour order 1): 1000,1000 4750,1000 4750,4200 1000,4200
GND on Top Layer "GND_L01_P000" (solid, pour order 0): 1000,1000 4750,1000 4750,4200 1000,4200

## Silkscreen, mask and mechanical layers (free items; w line width, h text height)
Top Overlay:
  lines w10: 2610,3230 4400,3230 4400,4130 2610,4130 2610,3230 ; 3570,1070 4620,1070 4620,1950 3570,1950 3570,1070
  text "SD_Card" at 4460,3880 h60 r270
  text "IMU" at 4650,1720 h60 r270
Bottom Overlay:
  drawing of 5 lines, arcs and shapes, not listed
  text "DAQ V1" at 2217,3758 h100
  text "by" at 1985,3609.99 h60

## Text inside footprints (layer, text, board x,y; h text height)
MCP_CAN: Top Overlay "CAN Bus" at 1500,3670 h80